# EAGLE board JetRacerWIfiAntennaSupport_partsRev4 (EAGLE 9.6.2)

Size 157.63 x 45.75 mm. Coordinates in mm from the lower left corner, seen from the top.
Outline: 14.69,32.97 arc90 11.34,36.37 arc59 8.69,34.87 8.69,31.07 arc59 11.34,29.62 arc90 14.69,32.97
Outline: 16.9,45.53 46.82,29 110.82,29 140.74,45.53 arc-46 149.5,43.75 157.3,31.07 arc-54 156.03,24 126.82,0 30.82,0 1.61,24 arc-54 0.34,31.07 8.14,43.75 arc-46 16.9,45.53
Outline: 142.95,32.97 arc-90 146.3,36.37 arc-59 148.95,34.87 148.95,31.07 arc-59 146.3,29.62 arc-90 142.95,32.97
Copper layers (1*16): Top 0.035mm / dielectric 1.5mm / Bottom 0.035mm
Design rules "SeeedStudio_2layer_DRU_no_angle_20140221": minimum track width 6mil, minimum drill 12mil, track to track 6mil, track to pad 6mil, pad to pad 6mil, via to via 6mil, smd to smd 0mil, copper to edge 10mil, drill to drill 10mil, minimum pad ring 10mil, minimum via ring 6mil, stop-mask expansion 2mil, vias tented up to drill 100mil, thermal gap 10mil
Holes 3.6 mm at 56.82,9.5 56.82,19.5 100.82,9.5 100.82,19.5

## Placement (x,y rotation side)
E$1  [LOGO_FABO_L]  78.66,14.73 0 top
E$2  [LOGO_FABO_L]  78.98,14.73 0 bottom

## Library data of the parts
E$1 E$2 = FaBo-Logo

## Text on the board
tPlace: TOP | JR-WS | Rev4
bPlace: BOTTOM | JR-WS | Rev4
tDocu: 長径 6.7mm / 短径 5.7mm *2 | Φ3.6mm*4 | JetRacerWifiSupportRev4(JR-WS)
bDocu: 長径 6.7mm / 短径 5.7mm *2